# EAGLE board Lichtschranke (EAGLE 9.6.2)
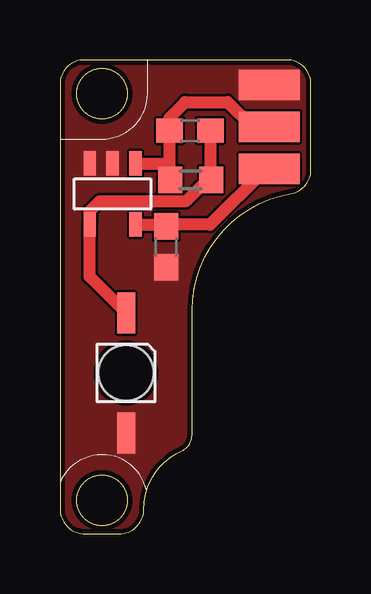
[diagram p0: board, top side]
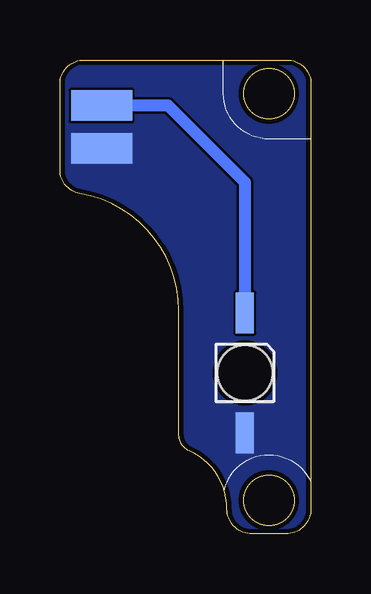
[diagram p1: board, bottom side, seen from below]

Size 10.46 x 19.76 mm. Coordinates in mm from the lower left corner, seen from the top.
Outline: 10.46,15.18 10.46,18.76 arc90 9.46,19.76 1,19.76 arc90 0,18.76 0,1.04 arc90 1.04,0 2.46,0 arc90 3.5,1.04 arc-66 5.07,3.46 arc66 5.5,4.11 5.5,9.31 arc-80 9.62,14.19 arc80 10.46,15.18
Outline: circle at 1.75,1.4 radius 1.05
Outline: circle at 1.75,18.36 radius 1.05
Copper layers (1*16): Top 0.018mm / dielectric 1.55mm / Bottom 0.018mm
Design rules "Multi-CB_2L_100um-Tracks_OL35um": minimum track width 0.1mm, minimum drill 0.2mm, track to track 0.1mm, track to pad 0.1mm, pad to pad 0.1mm, via to via 0.1mm, smd to smd 0mil, copper to edge 0.2mm, drill to drill 0.2mm, minimum pad ring 0.125mm, minimum via ring 0.1mm, stop-mask expansion 2mil, vias tented up to drill 0.45mm, thermal gap 0.2mm

## Footprints (pad centres in the part's own frame; a part is rotated, then mirrored left to right if it is on the bottom)
C0603 = smd 1.1 x 1: 1 -0.85,0; 2 0.85,0
LED-GULLR = smd 1.7 x 0.75: A 2.5,0; C -2.5,0 | hole 2.3: 0,0
SOT23-5 = smd 1.016 x 0.508: 1 -1.27,0.953; 2 -1.27,0; 3 -1.27,-0.953; 4 1.27,-0.953; 5 1.27,0.953
SMD1,27-2,54 = smd 1.27 x 2.54: 1 0,0
R0603 = smd 1 x 1.1: 1 -0.85,0; 2 0.85,0

## Placement (x,y rotation side)
C1  10p  [C0603]  5.42,16.82 180 top
C2  10u  [C0603]  4.43,11.97 90 top
D2  VSMB2000X01  [LED-GULLR]  2.75,6.71 270 bottom
D3  TEMD1000  [LED-GULLR]  2.75,6.71 270 top
IC1  OPA320  [SOT23-5]  2.19,14.18 270 top
PAD1  [SMD1,27-2,54]  8.72,16.97 90 top
PAD2  [SMD1,27-2,54]  8.72,15.22 90 top
PAD3  [SMD1,27-2,54]  8.72,18.72 90 top
PAD4  [SMD1,27-2,54]  8.72,17.86 270 bottom
PAD5  [SMD1,27-2,54]  8.72,16.08 270 bottom
R1  1M  [R0603]  5.44,14.76 180 top

## Library data of the parts
C1 C2 = rcl; SPICEPREFIX: C
D2 D3 IC1 = Marvin
PAD1-PAD5 = wirepad
R1 = rcl; SPICEPREFIX: R

## Nets
+3V3: C2.2 IC1.5 PAD2.1
GND: C2.1 D3.A IC1.2 IC1.3 PAD3.1
GNDA: D2.C PAD4.1
IR-ADC_OUT: C1.2 IC1.1 PAD1.1 R1.2
N$62: C1.1 D3.C IC1.4 R1.1
VCC: D2.A PAD5.1

## Tracks (layer width: path | path; a pad name or v marks a point on that pad's centre or on a via)
+3V3
  Top 0.508: PAD2.1 8.57,15.22 6.24,12.89 4.5,12.89 C2.2 4.34,12.91 IC1.5
GND
  pour Top (no thermals): -0.68,19.66 -0.68,0.1 -0.07,-0.51 5.37,-0.51 6.13,0.26 6.13,8.87 11.26,14 11.26,19.84 10.62,20.48 0.13,20.48
GNDA
  Bottom 0.508: PAD4.1 5.95,17.86 2.75,14.66 D2.C
IR-ADC_OUT
  Top 0.508: PAD1.1 8.02,16.97 6.99,18 5.22,18 4.57,17.35 C1.2 4.57,15.45 | R1.2 4.57,14.79 4.57,15.45 | IC1.1 4.57,15.45
N$62
  Top 0.508: D3.C 1.24,10.72 IC1.4 1.24,13.45 1.64,13.86 5.24,13.86 6.14,14.76 R1.1 6.27,14.79 C1.1
VCC
  pour Bottom (no thermals): -0.86,16.23 -0.86,-0.05 -0.32,-0.58 -0.2,-0.71 0.69,-0.71 5.49,-0.71 5.98,-0.23 6.33,0.13 6.33,0.92 6.33,8.79 7.83,10.29 11.44,13.9 11.44,14.63 11.44,19.94 10.8,20.58 10.73,20.65 9.43,20.65 -0.04,20.65 -0.6,20.09 -0.86,19.84